# Altium PCB PCB2.PcbDoc
Units mil, origin at the board's own origin, x right, y up, seen from the top; angles counter-clockwise.
Board outline 2933.07 x 2933.07 mil, 2 copper layers (Top Layer, Bottom Layer); 37 components, 2 nets, 75 pads, 0 vias.
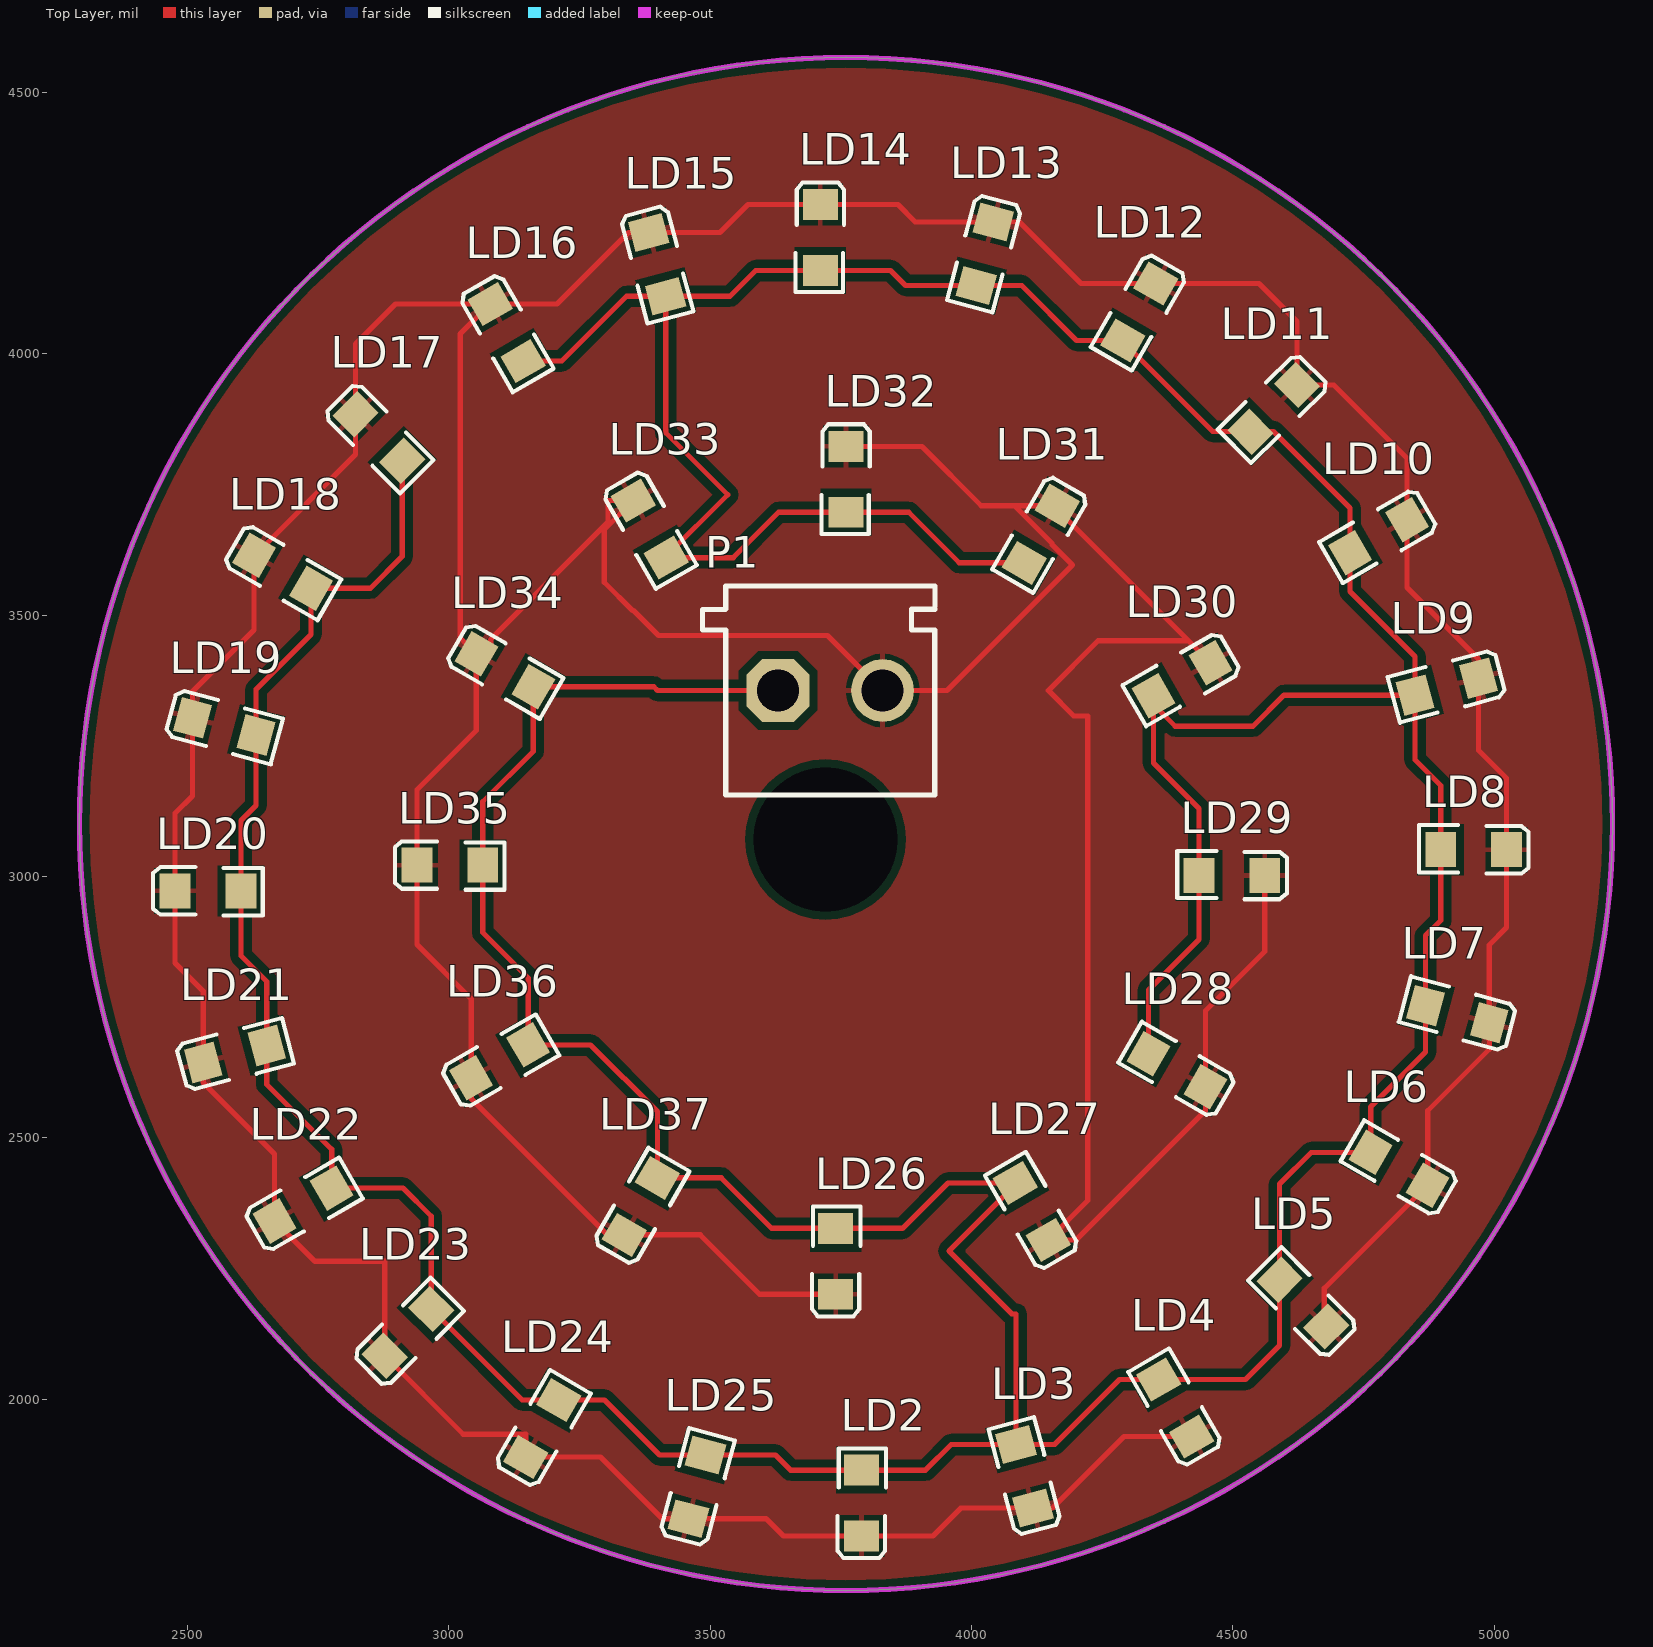
[diagram p0: Top Layer view]
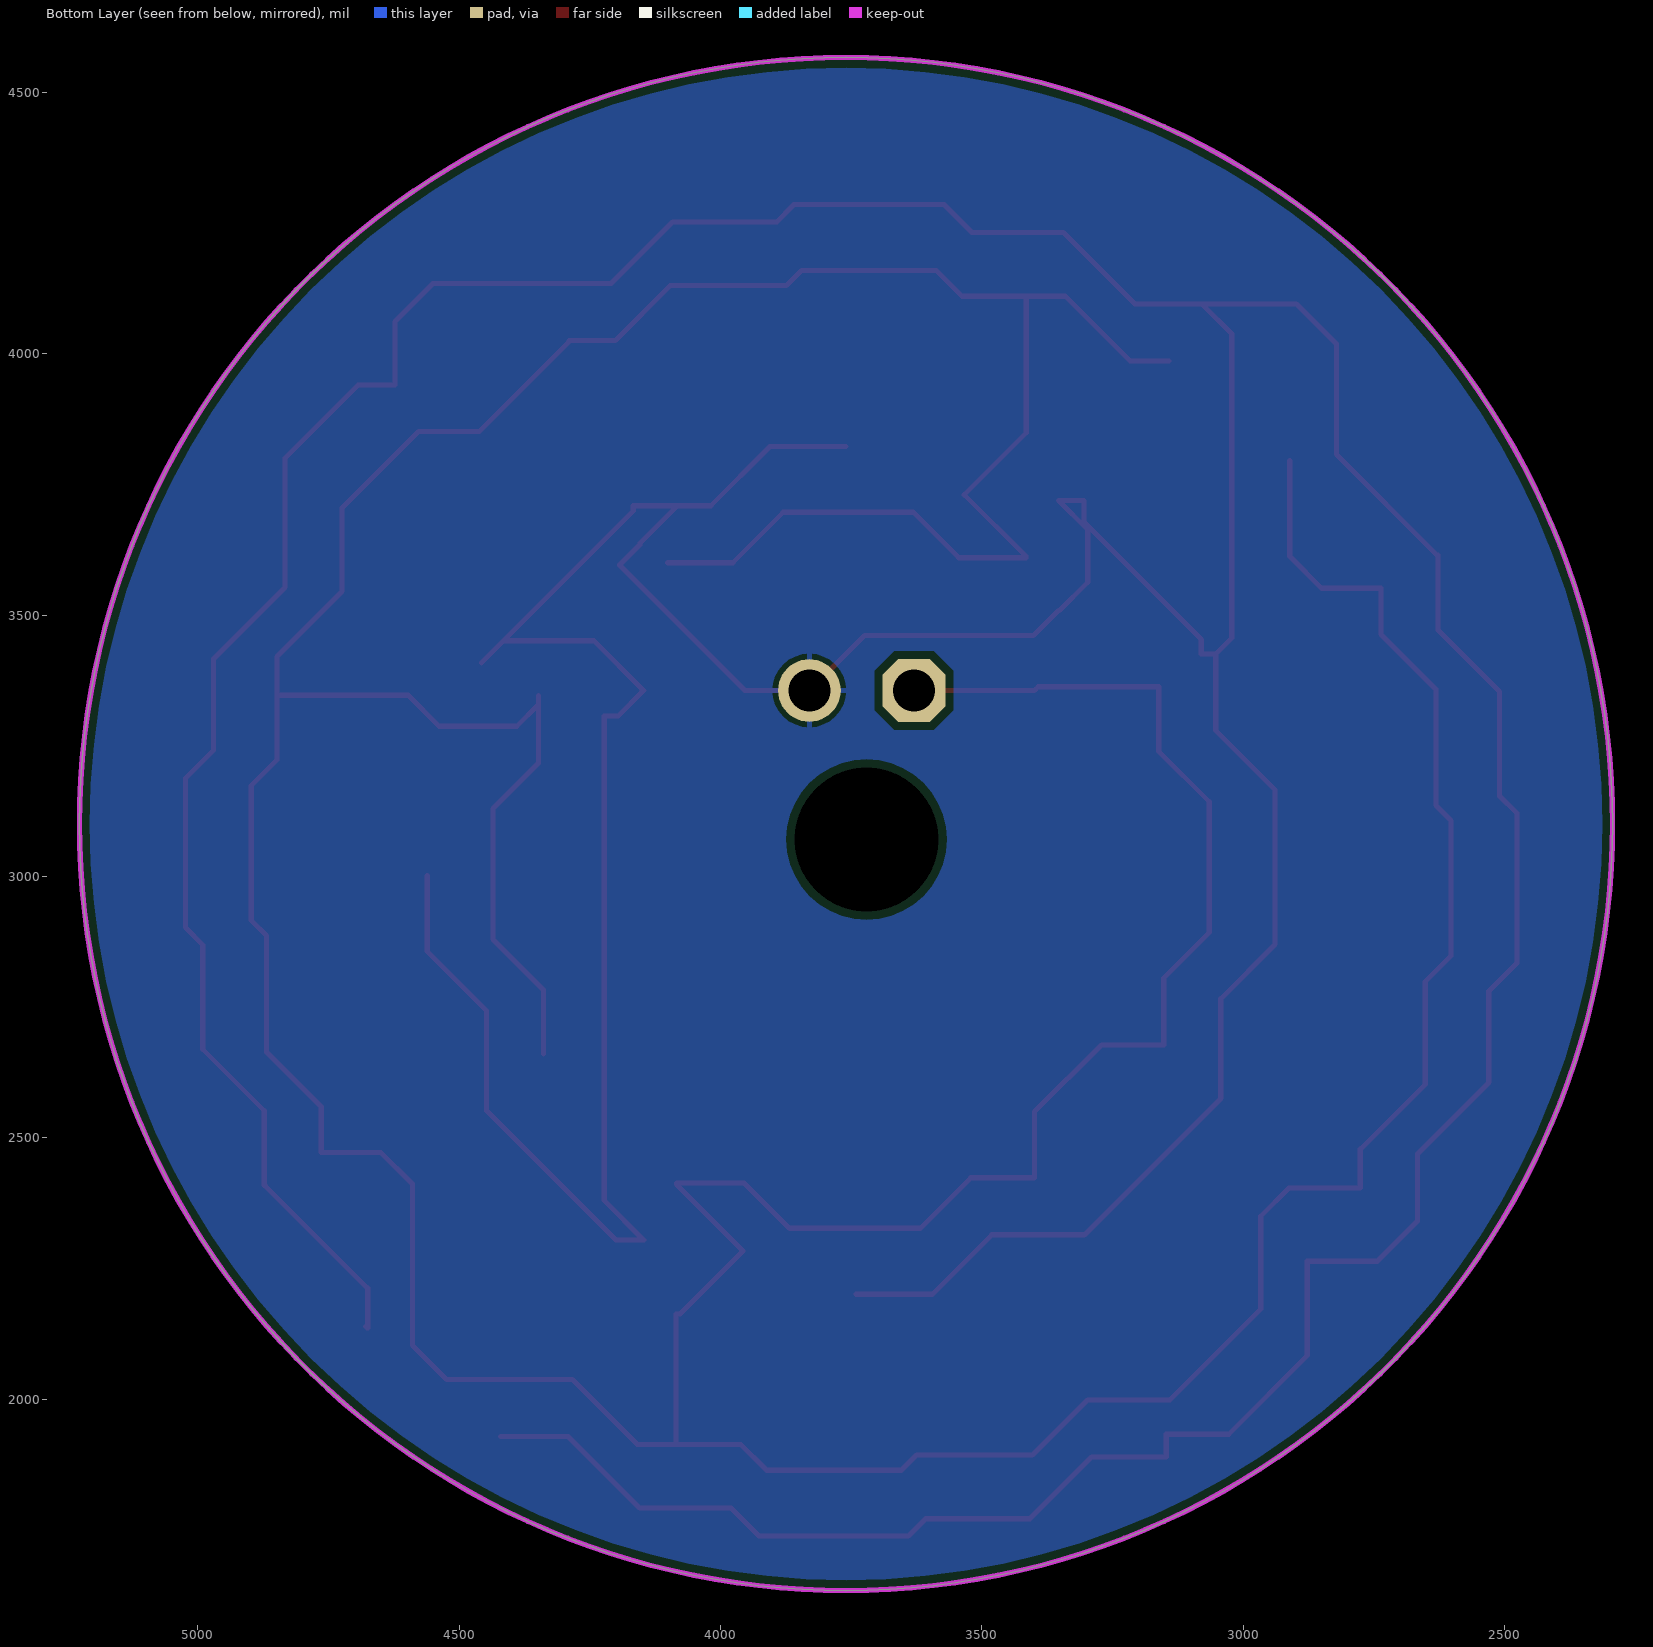
[diagram p1: Bottom Layer view, seen from below]

## Layer stack, top to bottom
Top Layer: signal copper 1.4
Dielectric: dielectric 12.6, FR-4, Dk 4.8
Bottom Layer: signal copper 1.4

## Board outline
2293.31,3100.39 ccw(c3759.84,3100.39) 3759.84,1633.86 ccw(c3759.84,3100.39) 5226.38,3100.39 ccw(c3759.84,3100.39) 3759.84,4566.93 ccw(c3759.84,3100.39)

## Design rules (kind name [scope] priority, off if disabled: settings)
Clearance [All] p1: gap=15
PolygonConnect [All] p1: connectstyle=Relief reliefconductorwidth=10 reliefentries=4 polygonreliefangle="90 Angle" airgapwidth=10
RoutingVias [All] p1: holewidth=28 width=50 viastyle="Through Hole" minholewidth=28 minwidth=50 maxholewidth=28 maxwidth=50
SolderMaskExpansion [All] p1: expansion=4
Width [All] p1: maxlimit=10 minlimit=10 preferedwidth=10
28 further rules are at their usual default settings.

## Classes and differential pairs
component class Sheet1: P1

## Components (designator, comment, footprint, x,y, rotation, side; value= is the part's Value field where it differs from the comment)
LD2 "SMD LED" "LED_1206 YEL" 3789.37,1801.18 r270 top (schematic designator LD1)
LD3 "SMD LED" "LED_1206 YEL" 4101.36,1852.62 r285 top (schematic designator LD1)
LD4 "SMD LED" "LED_1206 YEL" 4389.41,1983.06 r300 top (schematic designator LD1)
LD5 "SMD LED" "LED_1206 YEL" 4633.88,2183.61 r315 top (schematic designator LD1)
LD6 "SMD LED" "LED_1206 YEL" 4818.12,2440.59 r330 top (schematic designator LD1)
LD7 "SMD LED" "LED_1206 YEL" 4929.57,2736.51 r345 top (schematic designator LD1)
LD8 "SMD LED" "LED_1206 YEL" 4960.63,3051.18 r0 top (schematic designator LD1)
LD9 "SMD LED" "LED_1206 YEL" 4909.19,3363.17 r15 top (schematic designator LD1)
LD10 "SMD LED" "LED_1206 YEL" 4778.75,3651.22 r30 top (schematic designator LD1)
LD11 "SMD LED" "LED_1206 YEL" 4578.21,3895.69 r45 top (schematic designator LD1)
LD12 "SMD LED" "LED_1206 YEL" 4321.22,4079.93 r60 top (schematic designator LD1)
LD13 "SMD LED" "LED_1206 YEL" 4025.31,4191.38 r75 top (schematic designator LD1)
LD14 "SMD LED" "LED_1206 YEL" 3710.63,4222.44 r90 top (schematic designator LD1)
LD15 "SMD LED" "LED_1206 YEL" 3398.64,4171 r105 top (schematic designator LD1)
LD16 "SMD LED" "LED_1206 YEL" 3110.59,4040.56 r120 top (schematic designator LD1)
LD17 "SMD LED" "LED_1206 YEL" 2866.12,3840.02 r135 top (schematic designator LD1)
LD18 "SMD LED" "LED_1206 YEL" 2681.88,3583.03 r150 top (schematic designator LD1)
LD19 "SMD LED" "LED_1206 YEL" 2570.43,3287.12 r165 top (schematic designator LD1)
LD20 "SMD LED" "LED_1206 YEL" 2539.37,2972.44 r180 top (schematic designator LD1)
LD21 "SMD LED" "LED_1206 YEL" 2590.81,2660.45 r195 top (schematic designator LD1)
LD22 "SMD LED" "LED_1206 YEL" 2721.25,2372.4 r210 top (schematic designator LD1)
LD23 "SMD LED" "LED_1206 YEL" 2921.79,2127.93 r225 top (schematic designator LD1)
LD24 "SMD LED" "LED_1206 YEL" 3178.78,1943.69 r240 top (schematic designator LD1)
LD25 "SMD LED" "LED_1206 YEL" 3474.69,1832.24 r255 top (schematic designator LD1)
LD26 "SMD LED" "LED_1206 YEL" 3740.16,2263.78 r270 top (schematic designator LD1)
LD27 "SMD LED" "LED_1206 YEL" 4115.49,2359.08 r300 top (schematic designator LD1)
LD28 "SMD LED" "LED_1206 YEL" 4392.89,2629.27 r330 top (schematic designator LD1)
LD29 "SMD LED" "LED_1206 YEL" 4498.03,3001.97 r0 top (schematic designator LD1)
LD30 "SMD LED" "LED_1206 YEL" 4402.74,3377.3 r30 top (schematic designator LD1)
LD31 "SMD LED" "LED_1206 YEL" 4132.54,3654.7 r60 top (schematic designator LD1)
LD32 "SMD LED" "LED_1206 YEL" 3759.84,3759.84 r90 top (schematic designator LD1)
LD33 "SMD LED" "LED_1206 YEL" 3384.51,3664.55 r120 top (schematic designator LD1)
LD34 "SMD LED" "LED_1206 YEL" 3107.11,3394.35 r150 top (schematic designator LD1)
LD35 "SMD LED" "LED_1206 YEL" 3001.97,3021.65 r180 top (schematic designator LD1)
LD36 "SMD LED" "LED_1206 YEL" 3097.26,2646.32 r210 top (schematic designator LD1)
LD37 "SMD LED" "LED_1206 YEL" 3367.46,2368.92 r240 top (schematic designator LD1)
P1 "Terminal 2pin" "Terminal 2pin" 3730.32,3356.3 r0 top

## Footprints (in the part's own frame and the unit in brackets; to place one, negate y for a bottom-side part, rotate by r counter-clockwise, add the part's x,y. Pads: shape width x height; smd on the part's side, far side on the other; paste and mask are expansions set on the pad)
"LED_1206 YEL" [mm]
  rect 1.5x1.7 smd: 1(-1.6,0) 2(1.6,0)
  silkscreen extent -2.65,-1.15 2.68,1.2, body extent -1.65,-0.8 1.55,0.8, height 1.11
"Terminal 2pin" [mil]
  oct 120x120 hole 80: 1(-100.5,-0.5)
  round 120 hole 80: 2(99.5,-0.5)
  silkscreen extent -245,-200 200,200, body extent -215,-154 199,150, height 413

## Part data
LD2 LD3 LD4 LD5 LD6 LD7 LD8 LD9 LD10 LD11 LD12 LD13 LD14 LD15 LD16 LD17 LD18 LD19 LD20 LD21 LD22 LD23 LD24 LD25 LD26 LD27 LD28 LD29 LD30 LD31 LD32 LD33 LD34 LD35 LD36 LD37: library part "LED SMD"

## Free pads (board coordinates)
  round 0 hole 275.59: 1(3720.47,3070.87)

## Nets (pads, with @x,y where several pads share a name; then routed paths per layer and width w, separated by ;. In a path a pad name is that pad's centre, name@x,y a point inside that pad or via, vN(x,y) a via of type N, cw(c..) or ccw(c..) an arc to the next point about the centre after c; other vN are vias at no path point)
GND: LD2.2 LD3.2 LD4.2 LD5.2 LD6.2 LD7.2 LD8.2 LD9.2 LD10.2 LD11.2 LD12.2 LD13.2 LD14.2 LD15.2 LD16.2 LD17.2 LD18.2 LD19.2 LD20.2 LD21.2 LD22.2 LD23.2 LD24.2 LD25.2 LD26.2 LD27.2 LD28.2 LD29.2 LD30.2 LD31.2 LD32.2 LD33.2 LD34.2 LD35.2 LD36.2 LD37.2 P1.2 | length 15993.5
  Top Layer w10: LD26.2 3594.58,2200.78 3481,2314.36 LD37.2 3303.35,2314.36 3042.71,2575 LD36.2 3042.71,2766 2938.97,2869.74 LD35.2 2938.97,3166 3052.55,3279.58 LD34.2 ; LD32.2 3905,3822.84 4018.58,3709.26 4082.24,3709.26 ; LD4.2 4291.5,1928.5 4154.77,1791.77 LD3.2 3979.59,1791.77 3926,1738.18 LD2.2 3640.21,1738.18 3607,1771.39 LD25.2 3407.61,1771.39 3289.87,1889.13 LD24.2 3147.28,1933 3027.63,1933 LD23.2 2877.25,2263.65 2743.94,2263.65 LD22.2 2666.69,2469.31 2529.96,2606.04 LD21.2 2529.96,2781 2476.37,2834.59 LD20.2 2476.37,3121 2509.58,3154.21 LD19.2 2509.58,3353.58 2627.32,3471.32 LD18.2 2629,3614.53 2821.57,3807.1 LD17.2 2821.57,4018.57 2898.12,4095.12 LD16.2 ; LD30.2 4415.17,3450.93 ; LD29.2 4561.03,2856.58 4447.45,2743 LD28.2 4447.45,2551.97 4200,2304.52 LD27.2 4222.44,2379.96 4222.44,3307.09 4195.7,3307.09 4146.99,3355.79 4242.13,3450.93 4415.17,3450.93 ; LD5.2 4675.65,2136.27 4675,2136.27 4675,2212.09 4872,2409.09 LD6.2 4872.68,2551.68 4990.42,2669.42 LD7.2 4990.42,2869 5023.63,2902.21 LD8.2 5023.63,3188 4970.04,3241.59 LD9.2 4970.04,3415.96 4833.31,3552.69 LD10.2 4833.31,3800 4693.07,3940.24 LD11.2 4622.75,4061.74 4550,4134.49 LD12.2 4209.51,4134.49 4091.77,4252.23 LD13.2 3892.21,4252.23 3859,4285.44 LD14.2 3572.59,4285.44 3519,4231.85 LD15.2 3343.85,4231.85 3207.12,4095.12 LD16.2 ; LD34.2 3021.65,3456.74 3021.65,4037.69 LD16.2 ; LD34.2 3080,3425.85 3080,3453.3 3304.7,3678 3304.7,3719.11 LD33.2 3297.24,3663.34 3297.24,3562.99 3351.24,3508.99 3353.01,3508.99 3401,3461 3724.62,3461 P1.2 3952.8,3355.8 4192.91,3595.91 4154,3634.83 4154,3637.5 4082.24,3709.26 ; 4082.24,3709.26 LD31.2 4167,3709.26 4167,3699.1 4415.17,3450.93
VCC: LD2.1 LD3.1 LD4.1 LD5.1 LD6.1 LD7.1 LD8.1 LD9.1 LD10.1 LD11.1 LD12.1 LD13.1 LD14.1 LD15.1 LD16.1 LD17.1 LD18.1 LD19.1 LD20.1 LD21.1 LD22.1 LD23.1 LD24.1 LD25.1 LD26.1 LD27.1 LD28.1 LD29.1 LD30.1 LD31.1 LD32.1 LD33.1 LD34.1 LD35.1 LD36.1 LD37.1 P1.1 | length 13301.8
  Top Layer w10: LD17.1 2910.66,3612.19 2850,3551.53 LD18.1 2736.44,3463.15 2631.29,3358 LD19.1 2631.29,3135.92 2602.37,3107 LD20.1 2602.37,2848.29 2651.66,2799 LD21.1 2651.66,2602.14 2775.81,2478 LD22.1 2912.44,2403.9 2966.34,2350 LD23.1 3140.57,1998.25 LD24.1 3298,1998.25 3403.15,1893.1 LD25.1 3625,1893.1 3653.91,1864.18 LD2.1 3912,1864.18 3961.29,1913.48 LD3.1 ; LD16.1 3216,3986 3340.14,4110.15 LD15.1 ; P1.1 3399.05,3355.8 3392,3362.85 LD34.1 3161.67,3239.7 3064.97,3143 LD35.1 3064.97,2892.86 3151.82,2806 LD36.1 3271.18,2677.82 3398.96,2550.04 LD37.1 3521,2423.48 3617.7,2326.78 LD26.1 3868,2326.78 3954.86,2413.64 LD27.1 4083.99,2410.76 3956.69,2283.46 4077.16,2163 4085.06,2163 LD3.1 ; LD31.1 3976.51,3600.14 3879.82,3696.84 LD32.1 3630.86,3696.84 3544,3609.99 LD33.1 3416.01,3612.86 3533.46,3730.32 3414.94,3848.84 LD15.1 ; LD28.1 4338.33,2783 4435.03,2879.7 LD29.1 4435.03,3130 4348.18,3216.86 LD30.1@4348.18,3328.99 ; LD30.1 LD30.1@4348.18,3328.99 ; LD15.1 3538,4110.15 3587.29,4159.44 LD14.1 3845,4159.44 3873.91,4130.53 LD13.1 4096,4130.53 4201.15,4025.37 LD12.1 4289.72,4023 4461.57,3851.15 LD11.1 4577.85,3851.15 4724.19,3704.81 LD10.1 4724.19,3545.14 4848.34,3421 LD9.1 ; LD3.1 4159,1913.48 4283.14,2037.62 LD4.1 4524.17,2037.62 4589.34,2102.78 LD5.1 4589.34,2411.43 4650,2472.09 LD6.1 4763.56,2559 4868.72,2664.15 LD7.1 4868.72,2887 4897.63,2915.91 LD8.1 4897.63,3174 4848.34,3223.29 LD9.1 ; LD30.1@4348.18,3328.99 4389.76,3287.4 4538.6,3287.4 4598.07,3346.87 LD9.1

## Polygon pours and split planes (outlines as drawn)
GND on Top Layer "Top Layer-No Net" (solid, remove dead copper, pour order 2): 2125.98,4645.67 2194.88,4576.77 2194.88,1515.75 5364.17,1515.75 5442.91,1437.01 5314.96,1564.96 5314.96,4724.41
GND on Bottom Layer "Top Layer-No Net" (solid, remove dead copper, pour order 4): 1958.66,4734.25 5403.54,4734.25 5511.81,4842.52 5482.28,4812.99 5482.28,1594.49 1742.13,1594.49 1653.54,1683.07

## Keep-outs
Keep-Out Layer:
  circle w10: c3759.84,3100.39 r1466.54